# EAGLE board rfm69_32u4 (EAGLE 8.2.2)
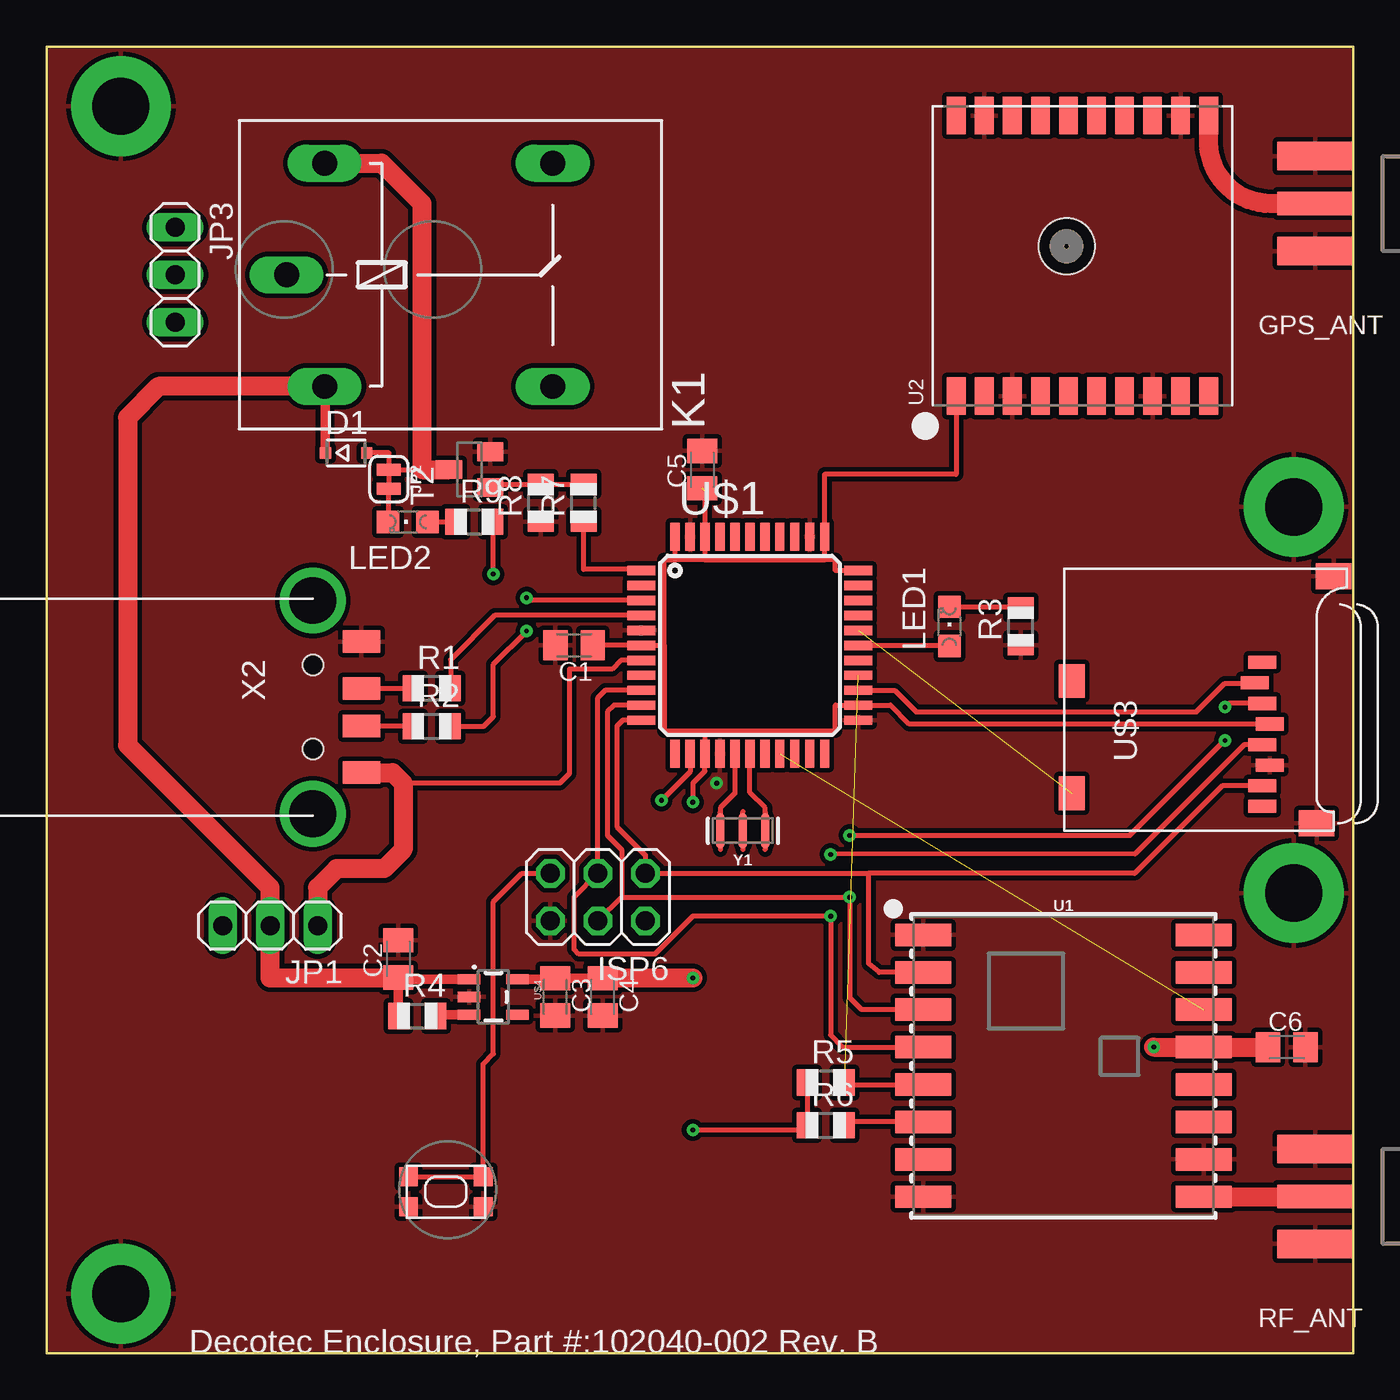
[diagram p0: board, top side]
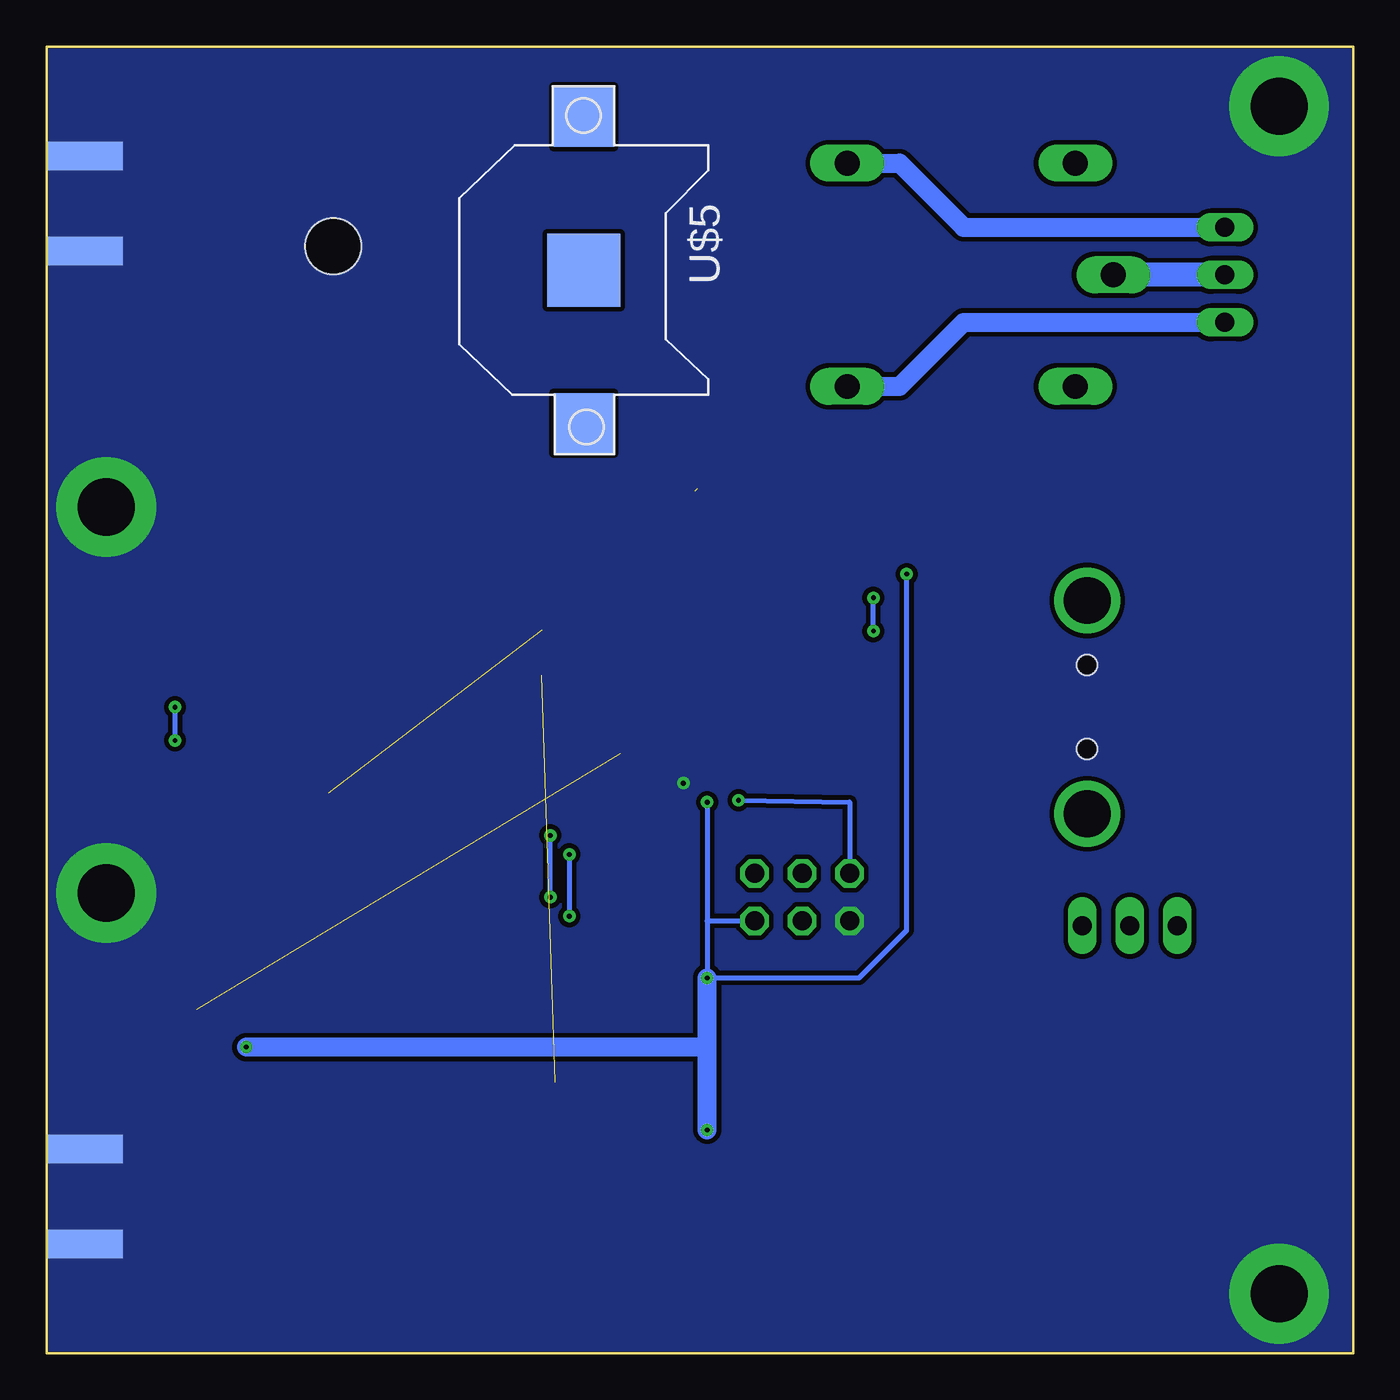
[diagram p1: board, bottom side, seen from below]

Size 69.85 x 69.85 mm. Coordinates in mm from the lower left corner, seen from the top.
Copper layers (1*16): Top 0.035mm / dielectric 1.5mm / Bottom 0.035mm
Design rules "default *": minimum track width 6mil, minimum drill 10mil, track to track 10mil, track to pad 6mil, pad to pad 6mil, via to via 6mil, smd to smd 6mil, copper to edge 1mil, drill to drill 6mil, minimum pad ring 10mil, minimum via ring 8mil, stop-mask expansion 4mil, vias tented up to drill 0mil, thermal gap 10mil

## Footprints (pad centres in the part's own frame; a part is rotated, then mirrored left to right if it is on the bottom)
C0805K = smd 1.3 x 1.6: 1 -1,0; 2 1,0
SOD323-R = smd 0.6 x 0.6: A 1.1,0; C -1.1,0
SMA_EDGELAUNCH = smd 4.064 x 1.524: GND@1 2.032,-2.54; GND@2 2.032,2.54 | smd 4.064 x 1.524 bottom: GND@3 2.032,2.54; GND@4 2.032,-2.54 | smd 4.064 x 1.27: P 2.032,0
2X03 = drill 1.016 octagon: 1 -2.54,-1.27; 2 -2.54,1.27; 3 0,-1.27; 4 0,1.27; 5 2.54,-1.27; 6 2.54,1.27
1X03 = drill 1.016 long: 1 -2.54,0; 2 0,0; 3 2.54,0
SMT-JUMPER_2_NC_TRACE_SILK = smd 0.635 x 1.27: 1 -0.508,0; 2 0.508,0
G5LE = drill 1.321 long: 1 -7.493,-5.969; 2 -7.493,5.969; O 4.699,5.969; P -9.525,0; S 4.699,-5.969
CHIPLED_0805 = smd 1.2 x 1.2: A 0,-1.05; C 0,1.05
R0805 = smd 1.1 x 1.4: 1 -1,0; 2 1,0
KMR2 = smd 1 x 1: 1 2,0.8; 2 2,-0.8; 3 -2,0.8; 4 -2,-0.8
SOT23-BEC = smd 1 x 1.4: B -0.95,-1.1; C 0,1.1; E 0.95,-1.1
RFM69HCW-XXXS2 = smd 3 x 1.2: 1 -7.5,7; 2 -7.5,5; 3 -7.5,3; 4 -7.5,1; 5 -7.5,-1; 6 -7.5,-3; 7 -7.5,-5; 8 -7.5,-7; 9 7.5,-7; 10 7.5,-5; 11 7.5,-3; 12 7.5,-1; 13 7.5,1; 14 7.5,3; 15 7.5,5; 16 7.5,7
FGPMMOPA6H = smd 2 x 1: P$1 -7.5,6.75; P$2 -7.5,5.25; P$3 -7.5,3.75; P$4 -7.5,2.25; P$5 -7.5,0.75; P$6 -7.5,-0.75; P$7 -7.5,-2.25; P$8 -7.5,-3.75; P$9 -7.5,-5.25; P$10 -7.5,-6.75; P$11 7.5,-6.75; P$12 7.5,-5.25; P$13 7.5,-3.75; P$14 7.5,-2.25; P$15 7.5,-0.75; P$16 7.5,0.75; P$17 7.5,2.25; P$18 7.5,3.75; P$19 7.5,5.25; P$20 7.5,6.75 | hole 3: 0.5,0.85
TQFP44 = smd 1.5 x 0.5: 1 -5.8,4; 2 -5.8,3.2; 3 -5.8,2.4; 4 -5.8,1.6; 5 -5.8,0.8; 6 -5.8,0; 7 -5.8,-0.8; 8 -5.8,-1.6; 9 -5.8,-2.4; 10 -5.8,-3.2; 11 -5.8,-4; 23 5.8,-4; 24 5.8,-3.2; 25 5.8,-2.4; 26 5.8,-1.6; 27 5.8,-0.8; 28 5.8,0; 29 5.8,0.8; 30 5.8,1.6; 31 5.8,2.4; 32 5.8,3.2; 33 5.8,4 | smd 0.5 x 1.5: 12 -4,-5.8; 13 -3.2,-5.8; 14 -2.4,-5.8; 15 -1.6,-5.8; 16 -0.8,-5.8; 17 0,-5.8; 18 0.8,-5.8; 19 1.6,-5.8; 20 2.4,-5.8; 21 3.2,-5.8; 22 4,-5.8; 34 4,5.8; 35 3.2,5.8; 36 2.4,5.8; 37 1.6,5.8; 38 0.8,5.8; 39 0,5.8; 40 -0.8,5.8; 41 -1.6,5.8; 42 -2.4,5.8; 43 -3.2,5.8; 44 -4,5.8
DECOTEC_102040-002B = drill 3.048 pad 5.334: P$1 3.969,3.175; P$2 3.969,66.675; P$3 66.675,45.244; P$4 66.675,24.606
MICROSD = smd 0.7 x 1.5: 1 9,-10.64; 2 7.9,-10.24; 3 6.8,-10.64; 4 5.7,-11.04; 5 4.6,-10.64; 6 3.5,-11.04; 7 2.4,-10.64; 8 1.3,-10.64 | smd 1.8 x 1.4: CD1 2,-0.44; CD2 8,-0.44 | smd 1.4 x 1.9: MT1 0.4,-13.54; MT2 13.6,-14.44
SOT23-5 = smd 0.55 x 1.2: 1 -0.95,-1.3; 2 0,-1.3; 3 0.95,-1.3; 4 0.95,1.3; 5 -0.95,1.3
CR1220-SMD = smd 3.2 x 3.2: +$1 -8.2,0; +$2 8.2,0 | smd 3.9 x 3.9: - 0,0
MOLEX_480371000 = smd 1.2 x 2: 1 3.5,2.6; 2 1,2.6; 3 -1,2.6; 4 -3.5,2.6 | drill 2.5: M1 -5.7,0; M2 5.7,0 | hole 1.1: -2.25,0; 2.25,0
RESONATOR-SMD-3.2X1.3 = smd 0.45 x 1.905: 1 -1.2,0; 2 0,0; 3 1.2,0

## Placement (x,y rotation side)
C1  10uF  [C0805K]  28.19,37.85 180 top
C2  10uF  [C0805K]  18.8,21.08 90 top
C3  10uF  [C0805K]  27.18,19.05 270 top
C4  1uF  [C0805K]  29.72,19.05 270 top
C5  1uF  [C0805K]  35.05,47.24 90 top
C6  10uF  [C0805K]  66.29,16.37 0 top
D1  1N4148  [SOD323-R]  16,48.13 0 top
GPS_ANT  [SMA_EDGELAUNCH]  69.85,61.47 180 top
ISP6  [2X03]  29.46,24.38 180 top
JP1  [1X03]  11.94,22.86 180 top
JP2  JUMPER-SMT_2_NC_TRACE_SILK  [SMT-JUMPER_2_NC_TRACE_SILK]  18.29,46.74 270 top
JP3  [1X03]  6.86,57.66 270 top
K1  G5LE  [G5LE]  22.35,57.66 0 top
LED1  [CHIPLED_0805]  48.26,38.86 0 top
LED2  [CHIPLED_0805]  19.3,44.45 90 top
R1  22  [R0805]  20.57,35.56 0 top
R2  22  [R0805]  20.57,33.53 0 top
R3  10k  [R0805]  52.07,38.86 90 top
R4  100K  [R0805]  19.81,18.03 0 top
R5  100K  [R0805]  41.66,14.48 0 top
R6  100K  [R0805]  41.66,12.19 0 top
R7  1k  [R0805]  28.7,45.47 90 top
R8  10K  [R0805]  26.42,45.47 90 top
R9  1k  [R0805]  22.86,44.45 0 top
RF_ANT  [SMA_EDGELAUNCH]  69.85,8.38 180 top
SW1  SPST_TACT-KMR2  [KMR2]  21.34,8.64 0 top
T2  [SOT23-BEC]  22.61,47.24 90 top
U1  433MHz  [RFM69HCW-XXXS2]  54.36,15.37 0 top
U2  [FGPMMOPA6H]  55.37,58.67 90 top
U$1  ATMEGA32U4-AU  [TQFP44]  37.59,37.85 0 top
U$2  DECOTEC_102040-002B  [DECOTEC_102040-002B]  0,0 0 top
U$3  MICROSD  [MICROSD]  54.36,27.94 90 top
U$4  SPX3819M5_3_3  [SOT23-5]  23.88,19.05 270 top
U$5  [CR1220-SMD]  41.15,57.91 270 bottom
X2  USB-A  [MOLEX_480371000]  14.22,34.54 270 top
Y1  8MHz  [RESONATOR-SMD-3.2X1.3]  37.21,27.94 180 top

## Library data of the parts
C1-C6 = rcl
D1 = diode
GPS_ANT LED1 LED2 R1-R9 RF_ANT SW1 U2 U$1 U$3 U$5 X2 = adafruit
ISP6 JP1 JP3 = pinhead
JP2 = SparkFun-Jumpers
K1 = relay; OC_FARNELL: unknown; OC_NEWARK: unknown
T2 = transistor
U1 = SparkFun-RF; PROD_ID: IC-12053
U$2 = vtgs
U$4 = SparkFun-IC-Power; PROD_ID: VREG-13321
Y1 = SparkFun-Clocks; PROD_ID: XTAL-08895

## Nets
0_GPS_TXD: U$1.20
1_GPS_RXD: U$1.21
2_RF_DIO0: U1.14 U$1.19
3D-FIX: U2.P$5
4_SD_CS: U$1.25 U$3.2
5: U$1.31
6: U$1.27
7_RELAY: R7.1 U$1.1
8: LED1.A U$1.28
9_SD_CD: U$1.29 U$3.CD1
10: U$1.30
11: U$1.12
12_RF_CS: R5.2 U1.5 U$1.26
13: U$1.32
14_MISO: ISP6.1 U1.2 U$1.11 U$3.7
15_SCK: ISP6.3 U1.4 U$1.9 U$3.5
16_MOSI: ISP6.4 U1.3 U$1.10 U$3.3
+3V3: C1.1 C3.1 C4.1 C5.1 C6.1 ISP6.2 R5.1 R6.1 R9.2 U1.13 U2.P$1 U$1.6 U$1.14 U$1.24 U$1.33 U$1.34 U$1.42 U$1.44 U$3.4 U$4.5
A0: U$1.36
A1: U$1.37
A2: U$1.38
A3: U$1.39
A4_RF_RST: U$1.40
A5: U$1.41
ANT: RF_ANT.P U1.9
D+: R1.2 U$1.4
D-: R2.2 U$1.3
EN: R4.2 U$4.3
GND: C1.2 C2.2 C3.2 C4.2 C5.2 C6.2 GPS_ANT.GND@1 GPS_ANT.GND@2 GPS_ANT.GND@3 GPS_ANT.GND@4 ISP6.6 R3.1 R8.1 RF_ANT.GND@1 RF_ANT.GND@2 RF_ANT.GND@3 RF_ANT.GND@4 SW1.2 SW1.4 T2.E U1.1 U1.8 U1.10 U2.P$3 U2.P$8 U2.P$12 U2.P$19 U$1.5 U$1.15 U$1.23 U$1.35 U$1.43 U$2.P$1 U$2.P$2 U$2.P$3 U$2.P$4 U$3.6 U$3.MT1 U$3.MT2 U$4.2 X2.4 Y1.2
GPS_PPS: U$1.18
GPS_RST: U2.P$2
GPS_RXD: U2.P$10
GPS_TXD: U2.P$9
N$1: R1.1 X2.3
N$2: LED1.C R3.2
N$3: R2.1 X2.2
N$4: D1.A JP2.1 K1.2 T2.C
N$7: GPS_ANT.P U2.P$11
N$8: R7.2 R8.2 T2.B
N$9: LED2.A R9.1
N$10: JP2.2 LED2.C
N$12: JP3.2 K1.P
N$13: JP3.1 K1.O
N$14: JP3.3 K1.S
PPS: U2.P$13
RF_RST: R6.2 U1.6
RST: ISP6.5 SW1.1 SW1.3 U$1.13
RTCM: U2.P$14
TXLED: U$1.22
V+: JP1.3
VBACKUP: U2.P$4
VBUS: JP1.1 U$1.7 X2.1
VIN: C2.1 D1.C JP1.2 K1.1 R4.1 U$4.1
X_RF_DIO1: U1.15
X_RF_DIO2: U1.16
X_RF_DIO3: U1.11
X_RF_DIO4: U1.12
X_RF_DIO5: U1.7
XTAL1: U$1.17 Y1.1
XTAL2: U$1.16 Y1.3

## Tracks (layer width: path | path; a pad name or v marks a point on that pad's centre or on a via)
2_RF_DIO0  (1 unrouted)
4_SD_CS
  Top 0.254: U$1.25 45.33,35.45 46.48,34.29 61.47,34.29 62.99,35.81 64.57,35.81 U$3.2
7_RELAY
  Top 0.254: U$1.1 31.79,41.91 28.7,41.91 R7.1
8
  Top 0.254: U$1.28 48.23,37.85 LED1.A
9_SD_CD  (1 unrouted)
12_RF_CS  (1 unrouted)
  Top 0.254: U1.5 42.77,14.37 R5.2
14_MISO
  Top 0.254: U1.2 44.5,20.37 43.94,20.83 43.94,25.62 43.91,25.65 | 43.91,25.65 ISP6.1 32,26.63 30.48,28.15 30.48,33.53 30.8,33.85 U$1.11 | 43.91,25.65 58.17,25.65 62.85,30.34 U$3.7
15_SCK  (via drill 0.25)
  Top 0.254: U$1.9 29.86,35.45 29.46,35.05 ISP6.3 28.19,24.38 28.19,21.59 28.45,21.34 32.51,21.34 34.54,23.37 v41.91,23.37 41.91,17.02 42.56,16.37 U1.4 | U$3.5 64.04,32.54 58.19,26.7 v41.91,26.67
  Bottom 0.254: v41.91,26.67 v41.91,23.37
16_MOSI  (via drill 0.25)
  Top 0.254: 30.73,24.38 30.73,26.92 29.97,27.69 29.97,34.29 30.33,34.65 U$1.10 | 30.73,24.38 v42.93,24.38 42.93,19.01 43.56,18.37 U1.3 | 30.73,24.38 ISP6.4 | v42.93,27.69 57.91,27.69 v62.99,32.77 | U$3.3 63.19,34.74 v62.99,34.54
  Bottom 0.254: v42.93,24.38 v42.93,27.69 | v62.99,32.77 v62.99,34.54
+3V3  (via drill 0.25)  (1 unrouted)
  Top 0.254: 40.66,14.39 R6.1 40.4,11.94 v34.54,11.94 | 40.66,14.39 R5.1 | 40.66,14.39 40.64,14.4 | C1.1 U$1.6 33.02,37.85 | v34.54,29.46 34.54,30.48 35.19,31.13 U$1.14 35.19,33.27 | 35.19,46.1 U$1.42 35.19,42.42 | 35.19,33.27 33.02,33.27 33.02,37.85 | 33.59,42.42 U$1.44 | 35.19,33.27 42.16,33.27 42.16,34.65 U$1.24 45.11,34.65 46.12,33.64 U$3.4 | 33.02,37.85 33.02,42.42 33.59,42.42 | U$1.33 42.16,41.85 42.16,42.42 41.59,42.42 | 35.19,42.42 41.59,42.42 | 35.19,42.42 33.59,42.42 | 41.59,42.42 U$1.34 41.59,46.99 48.62,46.99 U2.P$1 | v23.88,41.66 23.88,44.43 R9.2
  Top 0.508: U$4.5 27.13,20 C3.1 C4.1
  Top 1.016: C6.1 U1.13 v59.18,16.37 | v34.54,20.07 29.73,20.07 C4.1
  Bottom 0.254: v34.54,29.46 34.54,23.11 | 34.54,23.11 v34.54,20.07 26.42,20.07 23.88,22.61 v23.88,41.66 | 34.54,23.11 ISP6.2
  Bottom 1.016: 34.54,16.37 v59.18,16.37 | 34.54,16.37 v34.54,20.07 | v34.54,11.94 34.54,16.37
ANT
  Top 0.152: 67.8,8.37 RF_ANT.P
  Top 1.016: U1.9 67.8,8.37
D+
  Top 0.254: U$1.4 23.95,39.45 21.59,37.08 21.59,35.58 R1.2
D-  (via drill 0.25)
  Top 0.254: R2.2 23.37,33.53 23.88,34.04 23.88,36.83 v25.65,38.61 | U$1.3 25.79,40.25 v25.65,40.39
  Bottom 0.254: v25.65,38.61 v25.65,40.39
EN
  Top 0.508: U$4.3 20.88,18.1 R4.2
GND  (via drill 0.25)
  other vias: 35.81,30.48
  pour Bottom (no thermals): 0,0 0,69.85 69.85,69.85 69.85,0
  pour Top: 0,0 0,69.85 69.85,69.85 69.85,0
N$1
  Top 0.254: X2.3 19.56,35.54 R1.1
N$2
  Top 0.254: LED1.C 52.02,39.91 R3.2
N$3
  Top 0.254: X2.2 19.56,33.54 R2.1
N$4
  Top 0.254: D1.A 18.29,48.13 JP2.1 20.07,47.24
  Top 1.016: K1.2 17.91,63.63 20.07,61.47 20.07,47.24 T2.C
N$7
  Top 1.016: GPS_ANT.P 65.42,61.47 arc-90 62.12,64.77 U2.P$11
N$8
  Top 0.254: T2.B 23.71,46.47 R8.2 R7.2
N$9
  Top 0.254: LED2.A R9.1
N$10
  Top 0.254: JP2.2 18.25,46.23 LED2.C
N$12
  Bottom 1.27: JP3.2 K1.P
N$13
  Bottom 1.016: JP3.1 20.83,60.2 24.26,63.63 K1.O
N$14
  Bottom 1.016: JP3.3 20.83,55.12 24.26,51.69 K1.S
RF_RST
  Top 0.254: U1.6 42.83,12.37 R6.2
RST  (via drill 0.25)
  Top 0.254: SW1.3 SW1.1 23.34,15.46 23.88,16 23.88,24.13 25.4,25.65 ISP6.5 | U$1.13 34.39,31.09 v32.87,29.57
  Bottom 0.254: v32.87,29.57 26.92,29.46 ISP6.5
VBUS
  Top 0.254: U$1.7 30.7,37.05 30.23,36.58 27.94,36.58 27.94,30.99 27.43,30.48 19.05,30.48
  Top 1.016: X2.1 18.49,31.04 19.05,30.48 19.05,26.92 18.03,25.91 15.49,25.91 14.48,24.89 JP1.1
VIN
  Top 0.508: U$4.1 18.88,20 C2.1 18.8,18.05 R4.1 | D1.C 14.9,51.65 K1.1
  Top 1.016: C2.1 18.78,20.07 11.94,20.07 JP1.2 11.94,24.89 4.32,32.51 4.32,50.04 5.97,51.69 K1.1
XTAL1
  Top 0.254: U$1.17 37.59,29.97 38.41,29.15 Y1.1
XTAL2
  Top 0.254: Y1.3 36.01,29.15 36.79,29.93 U$1.16